# EAGLE board R5LED_pcb (EAGLE 5.06)
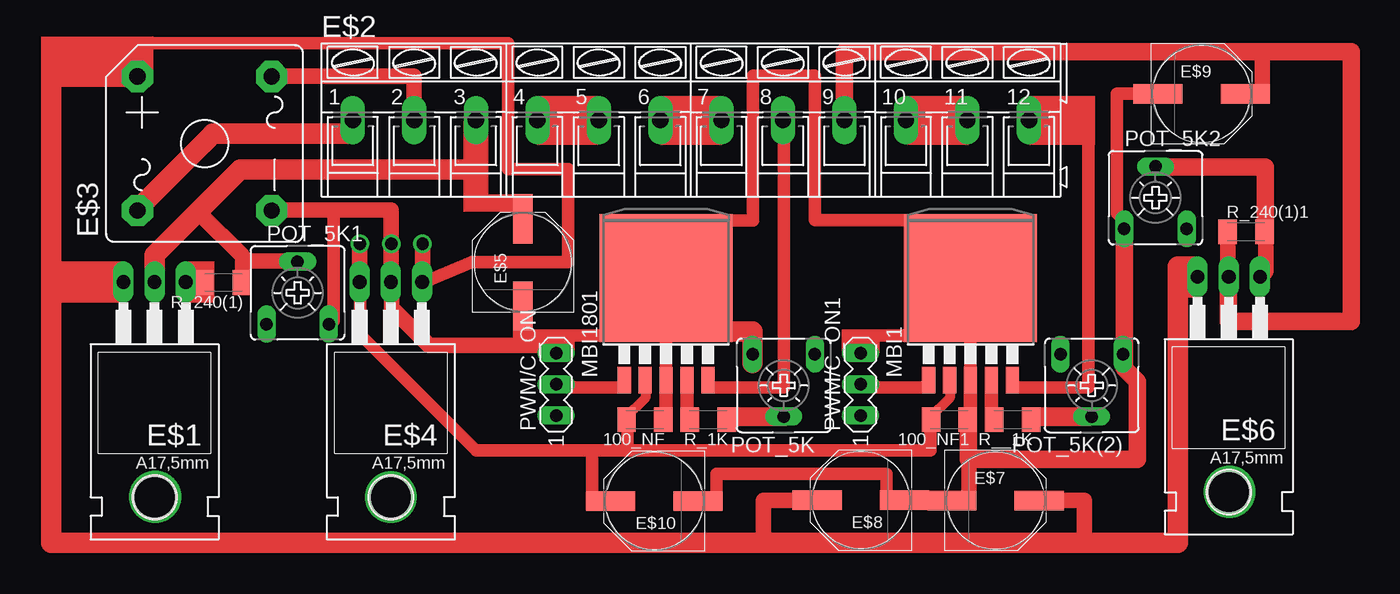
[diagram p0: board, top side]

No outline drawn. Coordinates in mm, seen from the top.
Copper layers (1*16): Top 0.035mm / dielectric 1.5mm / Bottom 0.035mm
Design rules "default": minimum track width 10mil, minimum drill 24mil, track to track 8mil, track to pad 8mil, pad to pad 8mil, via to via 8mil, smd to smd 8mil, copper to edge 40mil, drill to drill 8mil, minimum pad ring 10mil, minimum via ring 8mil, stop-mask expansion 4mil, vias tented up to drill 0mil, thermal gap 10mil
vRestrict: area 0,0 to 110,43

## Footprints (pad centres in the part's own frame; a part is rotated, then mirrored left to right if it is on the bottom)
C1206K = smd 1.5 x 2: 1 -1.5,0; 2 1.5,0
TO220 = drill 1.118 long: 1 -2.54,-6.35; 2 0,-6.35; 3 2.54,-6.35 | hole 3.302: 0,11.176
AK300/12 = drill 1.321 long: 1 -27.508,0; 2 -22.504,0; 3 -17.501,0; 4 -12.497,0; 5 -7.493,0; 6 -2.489,0; 7 2.489,0; 8 7.493,0; 9 12.497,0; 10 17.501,0; 11 22.504,0; 12 27.508,0
GBPC6 = drill 1.321 pad 2.54 octagon: + 5.461,5.461; - -5.461,-5.461; AC1 -5.461,5.461; AC2 5.461,-5.461
PANASONIC_F = smd 4 x 1.6: + 3.55,0; - -3.55,0
TO263-5 = smd 1.067 x 2.159: 1 -3.404,-5.791; 2 -1.702,-5.791; 3 0,-5.791; 4 1.702,-5.791; 5 3.404,-5.791 | smd 10.8 x 10.41: 6 0,2.54
CA6V = drill 1.016 long: A -2.54,-2.54; E 2.54,-2.54; S 0,2.54
MA03-1 = drill 1.016 long: 1 -2.54,0; 2 0,0; 3 2.54,0

## Placement (x,y rotation side)
100_NF  [C1206K]  50.65,11.85 180 top
100_NF1  [C1206K]  75.42,11.85 180 top
E$1  [TO220]  10.75,16.7 180 top
E$2  [AK300/12]  54.39,36.23 0 top
E$3  [GBPC6]  14.82,34.32 90 top
E$4  [TO220]  29.97,16.7 180 top
E$5  [PANASONIC_F]  40.72,24.65 90 top
E$6  [TO220]  98.15,17.12 180 top
E$7  [PANASONIC_F]  79.17,5.27 0 top
E$8  [PANASONIC_F]  68.22,5.29 180 top
E$9  [PANASONIC_F]  95.94,38.37 0 top
E$10  [PANASONIC_F]  51.41,5.22 180 top
MBI1  [TO263-5]  77.14,20.84 0 top
MBI1801  [TO263-5]  52.37,20.84 0 top
POT_5K  [CA6V]  61.94,14.63 180 top
POT_5K1  [CA6V]  22.39,22.17 0 top
POT_5K2  [CA6V]  92.19,29.91 0 top
POT_5K(2)  [CA6V]  87,14.63 180 top
PWM/C_ON  [MA03-1]  43.42,14.72 90 top
PWM/C_ON1  [MA03-1]  68.19,14.72 90 top
R_1K  [C1206K]  55.79,11.85 180 top
R_240(1)  [C1206K]  16.34,23.01 180 top
R_240(1)1  [C1206K]  99.56,27.14 0 top
R__1K  [C1206K]  80.56,11.85 180 top

## Library data of the parts
100_NF 100_NF1 E$5 E$7-E$10 R_1K R_240(1) R_240(1)1 R__1K = rcl
E$1 E$4 E$6 = transistor-pnp
E$2 = con-ptr500
E$3 = rectifier
MBI1 MBI1801 = linear
POT_5K POT_5K1 POT_5K2 POT_5K(2) = pot
PWM/C_ON PWM/C_ON1 = con-lstb

## Tracks (layer width: path | path; a pad name or v marks a point on that pad's centre or on a via)
S$1
  Top 1.016: 52.37,14.64 52.37,19.94
S$2
  Top 1.016: 48.97,15.44 48.97,14.47 43.37,14.47
S$3
  Top 1.016: 43.45,17.25 43.45,18.68 48.12,18.68
S$4
  Top 1.676: 54,20.42 54,19.01 59.41,19.01 59.41,16.48
S$5
  Top 1.016: 55.8,15.53 55.8,14.48 61.96,14.48 61.96,36.32 61.91,36.32
S$6
  Top 1.016: 77.14,14.64 77.14,19.94
S$7
  Top 1.016: 73.74,15.44 73.74,14.47 68.14,14.47
S$8
  Top 1.016: 68.22,17.25 68.22,18.68 72.89,18.68
S$9
  Top 1.676: 78.77,19.01 78.77,20.42
S$10
  Top 1.016: 80.57,15.53 80.57,14.48 86.73,14.48 86.73,36.32
S$11
  Top 1.016: 53.74,25.88 53.74,28.07 59.44,28.07 59.44,39.84 64.47,39.84 64.47,28.08 72.33,28.08
S$12
  Top 0.813: 50.68,14.84 50.68,13.62 48.99,11.93
S$13
  Top 0.813: 75.45,14.84 75.45,13.62 73.76,11.93
S$14
  Top 1.422: 66.9,36.22 66.9,41.81 108.12,41.81 108.12,19.83 98.11,19.83 98.11,23.88
S$15
  Top 1.27: 31.88,36.15 31.88,39.79 20.26,39.79
S$16
  Top 1.676: 26.93,37.14 26.93,35.11 15.48,35.11 15.48,35.09 9.24,28.85
S$17
  Top 1.422: 36.9,36.22 36.9,29.49 40.75,29.49
S$18
  Top 1.676: 9.41,39.78 2.35,39.78 2.35,1.83 94,1.83 94,24.3
S$19
  Top 1.016: 32.53,22.96 36.58,24.66 44.39,24.66 44.39,32.25 39.53,32.25 39.53,42.49 2.61,42.49
S$20
  Top 1.676: 10.77,22.94 10.77,25.26 17.72,32.21 36.91,32.21 36.91,36.19
S$21
  Top 1.27: 17.91,23.02 17.91,25.16 14.31,28.76
S$22
  Top 1.27: 20.32,28.9 30,28.9 30,22.78
S$23
  Top 1.27: 22.41,24.75 18.06,24.75
S$24
  Top 1.016: 25.02,19.59 25.31,19.88 25.31,28.6
S$25
  Top 1.27: 98.2,23.46 98.07,23.59 98.07,27.3
S$26
  Top 1.27: 100.68,23.42 101.18,23.92 101.18,27.12
S$27
  Top 1.016: 27.48,22.98 27.48,18.77 36.92,9.33 49.66,9.33 | 73.89,11.87 73.89,9.33 49.66,9.33 | 49.66,9.33 49.22,9.33 49.22,11.95 49.21,11.95
S$28
  Top 1.422: 92.15,32.42 101.11,32.42 101.11,27.44
S$29  (via drill 1)
  other vias: 32.55,26.16
S$30
  Top 1.27: 75.09,5.19 77,5.19 77,10.29
S$31
  Top 1.27: 81.46,5.29 86.4,5.29 86.4,2.06
S$32
  Top 1.27: 63.97,5.29 60.3,5.29 60.3,1.96
S$33
  Top 1.27: 99.43,38.36 100.89,38.36 100.89,41.63
S$34
  Top 1.016: 91.88,38.4 89.06,38.4 89.06,28.67 89.64,28.09
  Top 1.422: 89.64,28.17 89.64,28.09 89.64,16.02 90.72,14.94 90.72,8.62 76.98,8.62 76.98,11.31
S$35
  Top 1.016: 70.73,5.19 70.28,5.19 70.28,7.45 56.47,7.45 56.47,5.28
S$36
  Top 1.016: 48.17,5.41 46.36,5.41 46.36,9.13
S$37
  Top 1.27: 30.04,23.1 30.04,20.94 33.09,17.89 40.83,17.89
S$38  (via drill 1)
  other vias: 30.01,26.16
S$39  (via drill 1)
  other vias: 27.46,26.16
S$40
  Top 1.27: 32.55,26.19 32.55,22.97 32.51,22.97 | 27.43,22.91 27.43,26.13
S$41  (via drill 3.2)
  other vias: 10.8,5.56
S$42  (via drill 3.2)
  other vias: 29.98,5.54
S$43  (via drill 3.2)
  other vias: 98.22,5.98
(copper drawn outside any net)
  shapes: Top area x18